# Altium PCB PCB.PcbDoc
Units mm, origin at the board's own origin, x right, y up, seen from the top; angles counter-clockwise.
Board outline 50 x 50 mm, 2 copper layers (Top Layer, Bottom Layer); 26 components, 12 nets, 63 pads, 12 vias.
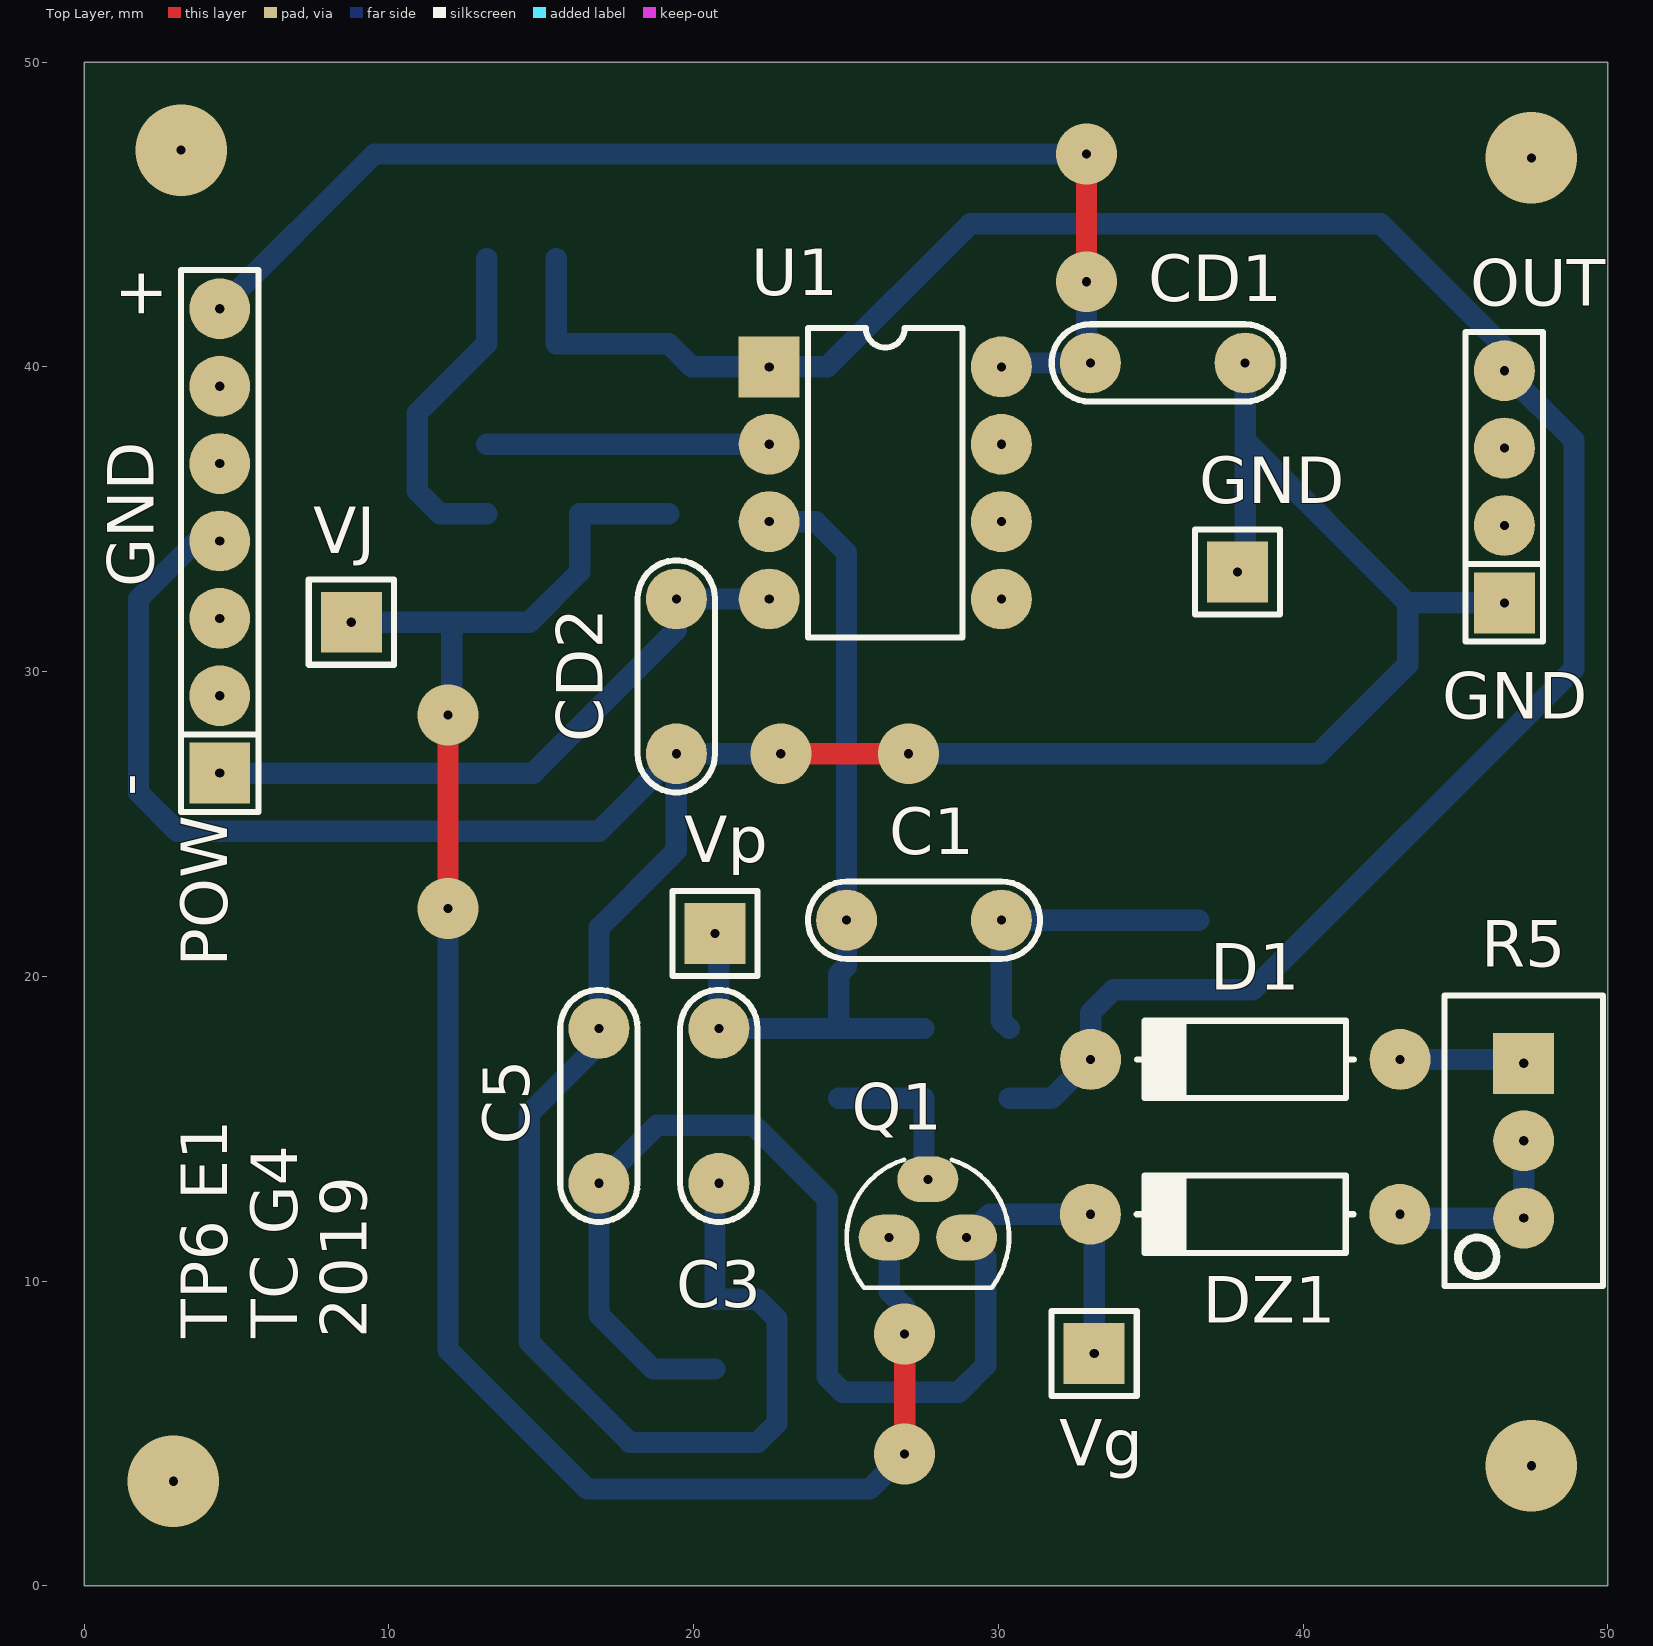
[diagram p0: Top Layer view]
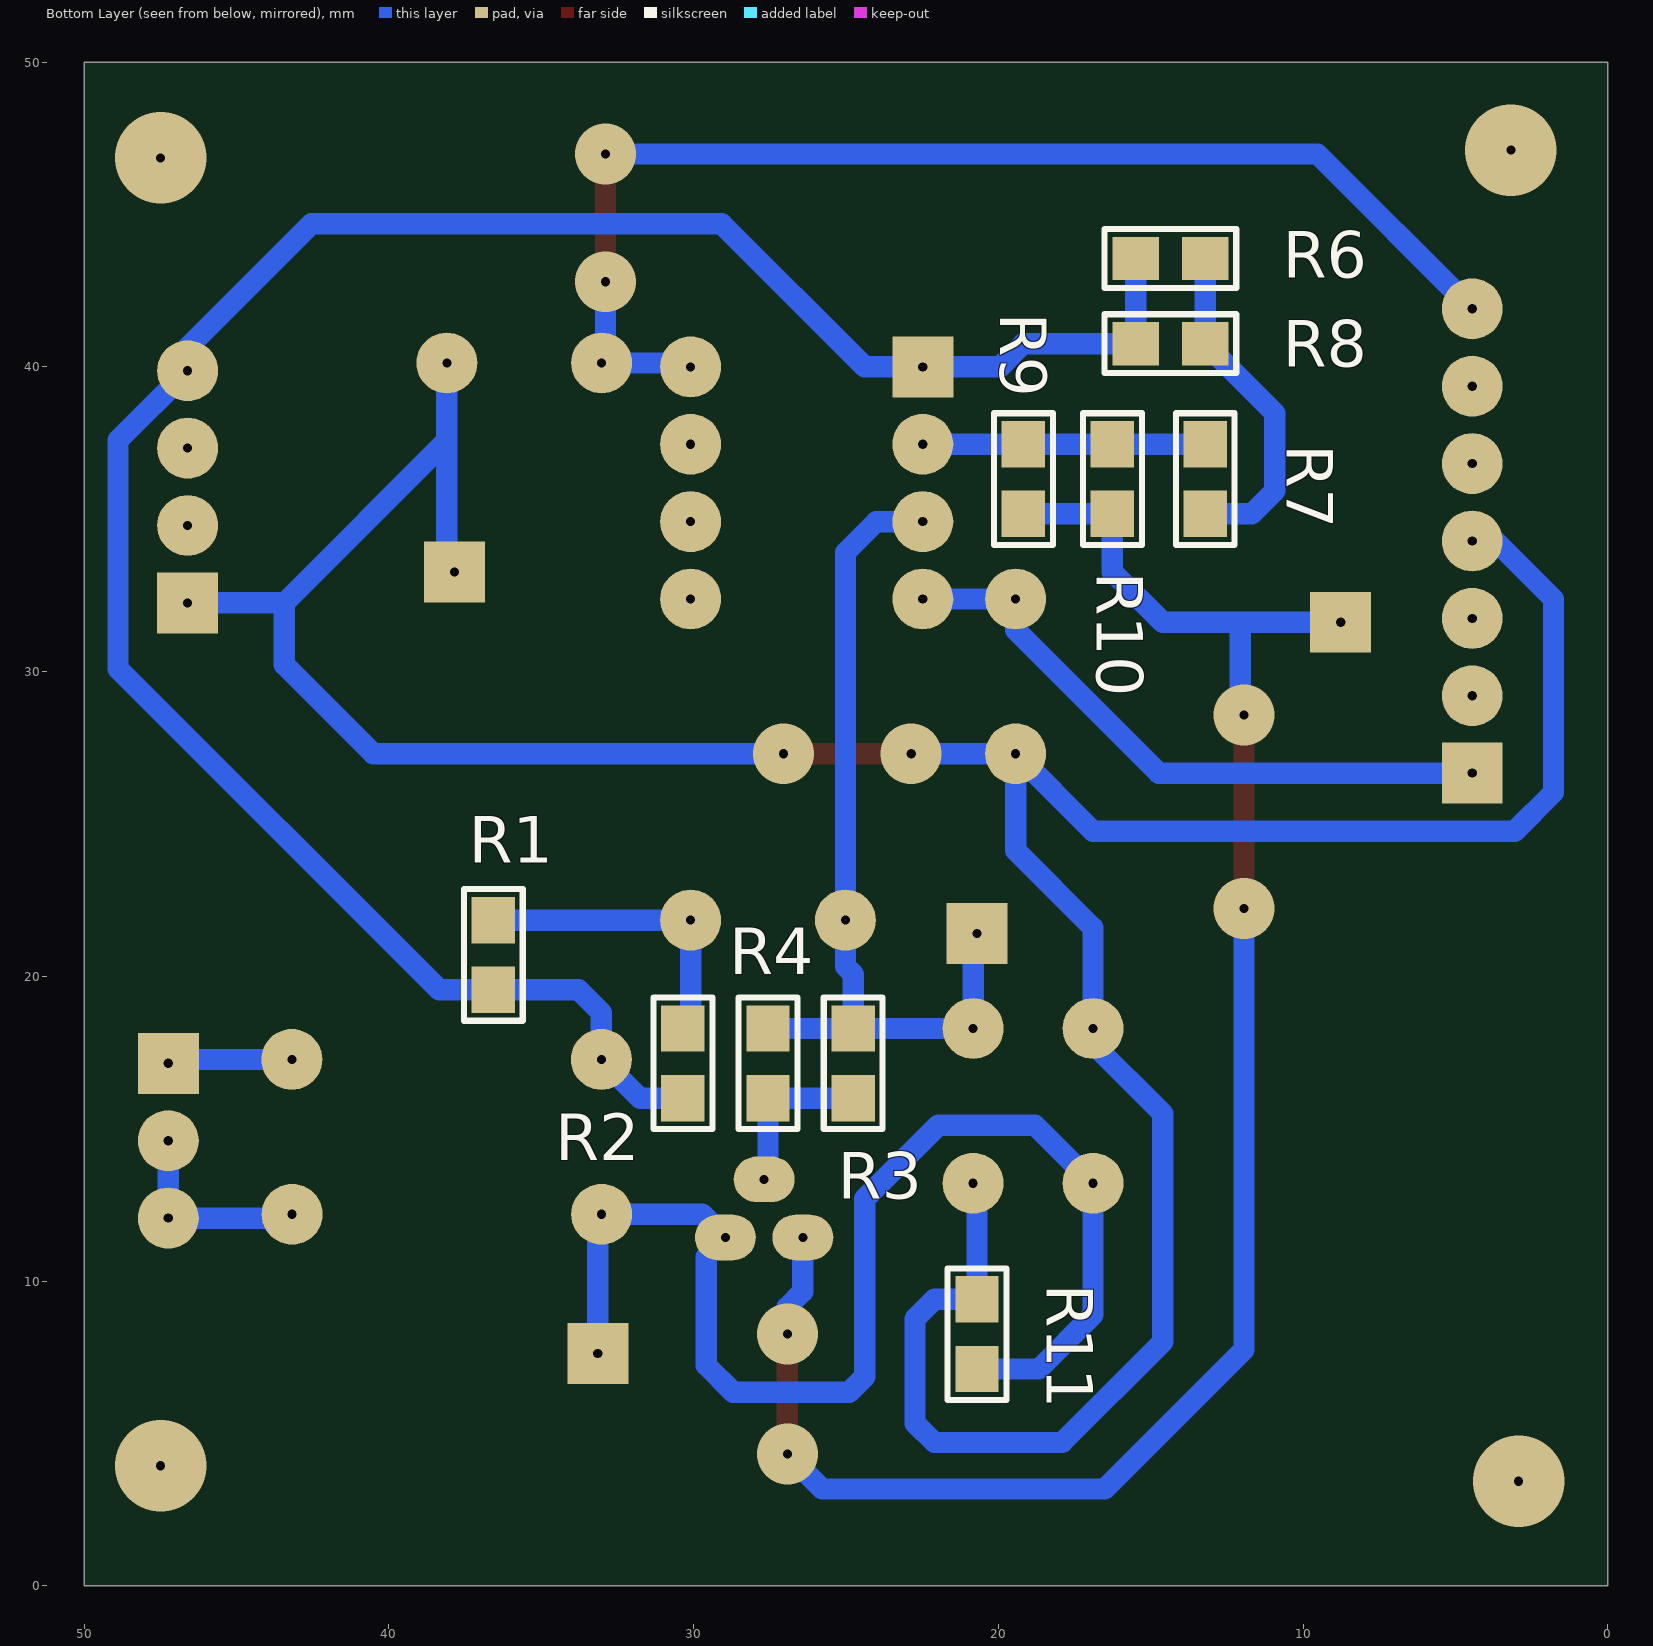
[diagram p1: Bottom Layer view, seen from below]
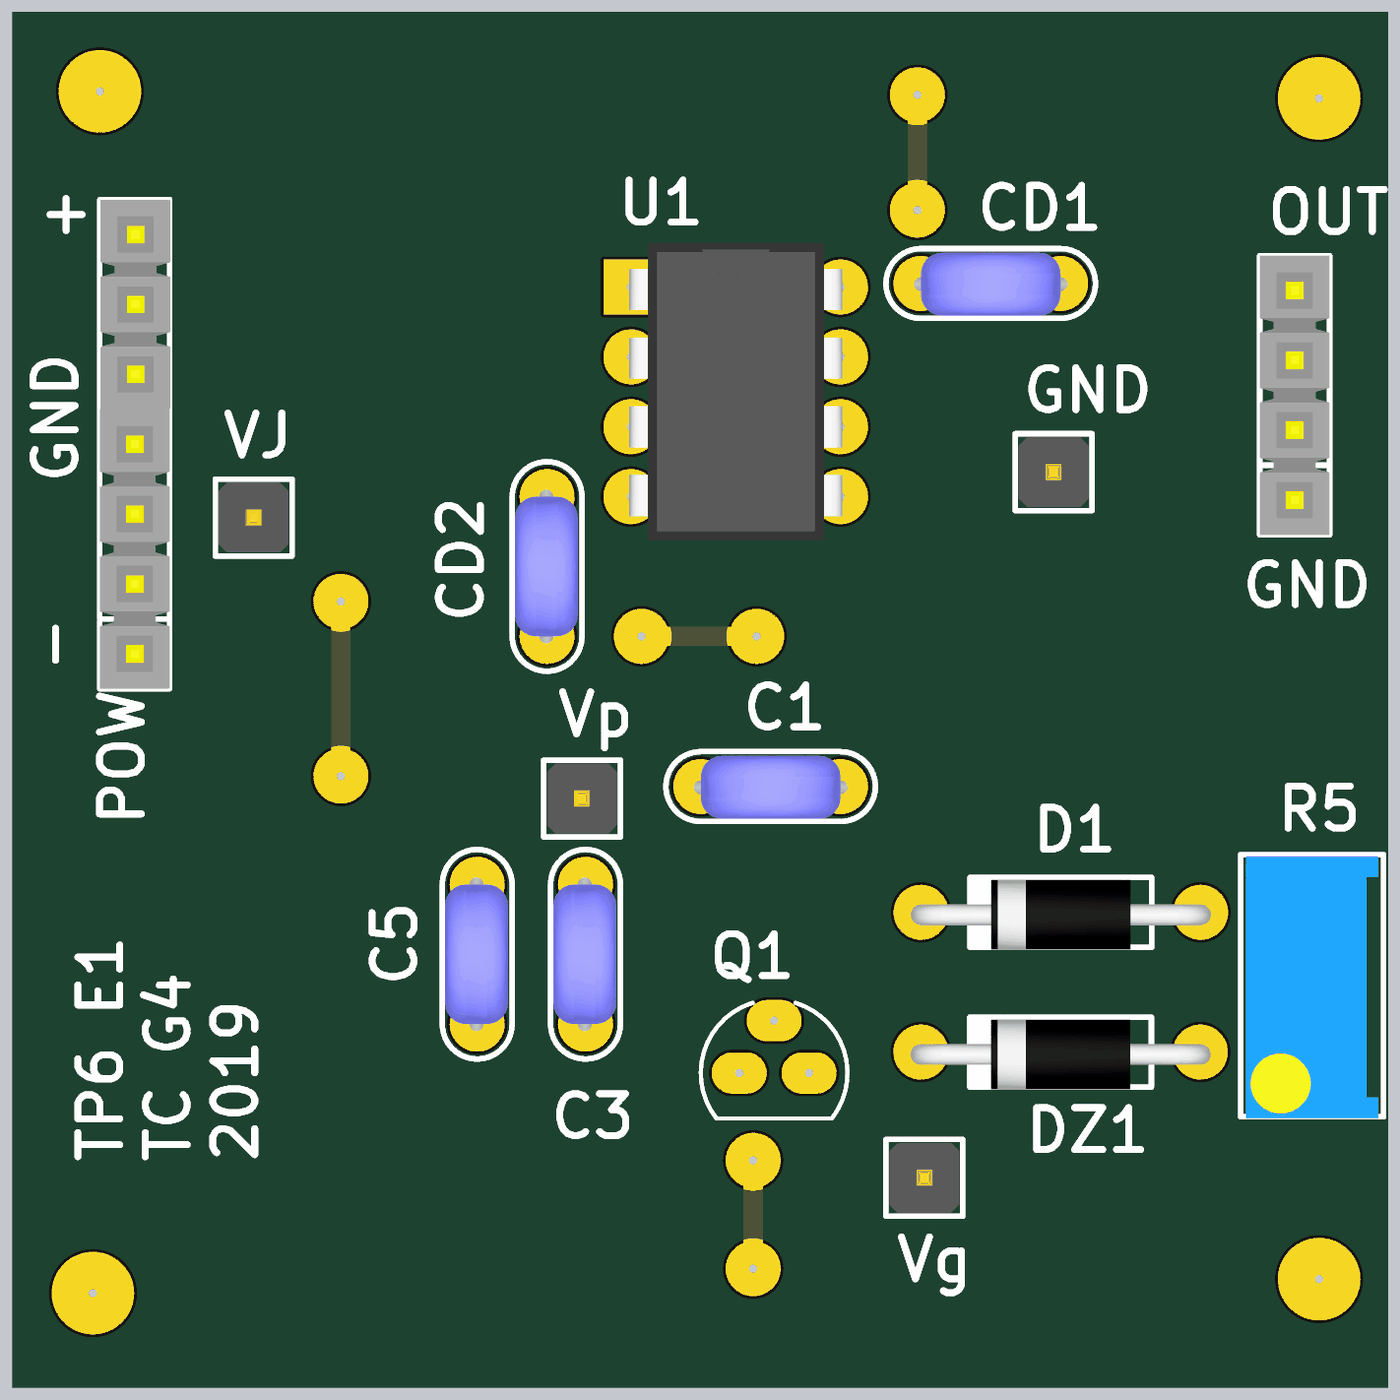
[diagram p2: 3D render of the assembled board from above, using the file's embedded part models]
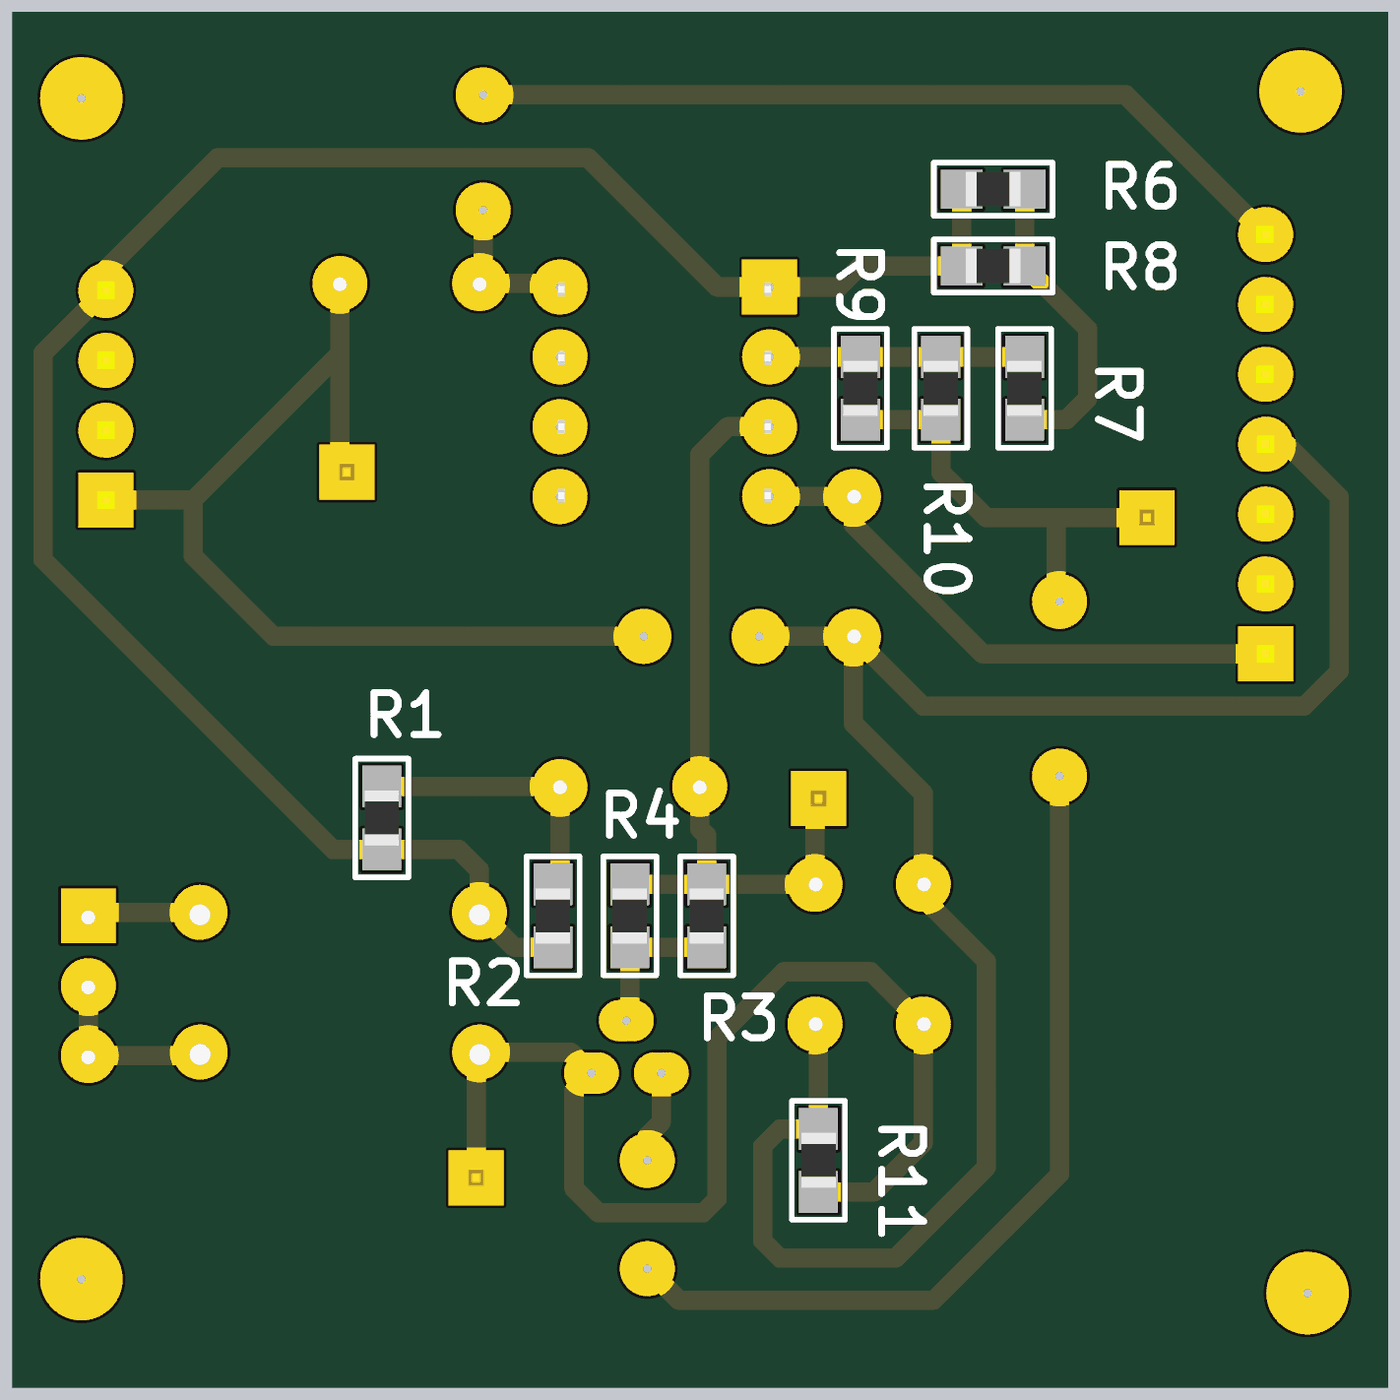
[diagram p3: 3D render of the assembled board from below, using the file's embedded part models]

## Layer stack, top to bottom
Top Solder: solder mask 0.0102, Solder Resist, Dk 3.5
Top Layer: signal copper 0.0356
Dielectric 1: dielectric 0.32, FR-4, Dk 4.8
Bottom Layer: signal copper 0.0356
Bottom Solder: solder mask 0.0102, Solder Resist, Dk 3.5

## Board outline
0,0 50,0 50,50 0,50

## Design rules (kind name [scope] priority, off if disabled: settings)
Clearance [All] p1: gap=0.254 ignorepadtopadclearanceinfootprint=FALSE except(0: Arc-Hole Track-Hole SMDPad-Hole THPad-Hole Via-Hole Fill-Hole Poly-Hole Region-Hole Text-Hole)
PolygonConnect [All] p1: connectstyle=Relief reliefconductorwidth=0.254 reliefentries=4 polygonreliefangle="90 Angle" airgapwidth=0.254
RoutingVias [All] p1: holewidth=0.711 width=1.27 viastyle="Through Hole" minholewidth=0.711 minwidth=1.27 maxholewidth=0.711 maxwidth=1.27
SolderMaskExpansion [All] p1: expansion=0.102
Width [All] p1: maxlimit=0.7 minlimit=0.7 preferedwidth=0.7 minimp=50.000000 maximp=50.000000 favimp=50.000000
30 further rules are at their usual default settings.

## Components (designator, comment, footprint, x,y, rotation, side; value= is the part's Value field where it differs from the comment)
C1 "10n" CAP200 27.559,21.844 r0 top
C3 "10n" CAP200 20.828,15.748 r270 top
C5 "10n" CAP200 16.891,15.748 r270 top
CD1 "10n" CAP200 35.56,40.132 r0 top
CD2 "10n" CAP200 19.431,29.845 r270 top
D1 "1N4148" DO41 38.108,17.272 r180 top
DZ1 "1N750" DO41 38.1,12.192 r180 top
GND "TP" TPTH 37.846,33.274 r0 top (schematic designator TP1)
OUT "CON4" SIP4 46.609,36.068 r90 top
POW "CON7" SIP7 4.445,26.67 r90 top
Q1 "MPF102" *TO92F 27.686,11.43 r0 top
R1 "390" 0805 36.576,20.701 r90 bottom
R2 "390" 0805 30.353,17.145 r90 bottom
R3 "390" 0805 24.765,17.145 r90 bottom
R4 "390" 0805 27.559,17.145 r90 bottom
R5 "1K" "PRESET V" 47.244,14.605 r270 top
R6 "10k" 0805 14.351,43.561 r180 bottom
R7 "470" 0805 13.208,36.322 r90 bottom
R8 "10k" 0805 14.351,40.767 r180 bottom
R9 "4.7k" 0805 19.177,36.322 r90 bottom
R10 "4.7k" 0805 16.256,36.322 r90 bottom
R11 "10k" 0805 20.701,8.255 r270 bottom
U1 "LM833" DIP8 22.479,40.005 r0 top
Vg "TP" TPTH 33.147,7.62 r0 top (schematic designator TP3)
VJ "TP" TPTH 8.763,31.623 r180 top (schematic designator TP4)
Vp "TP" TPTH 20.701,21.409 r0 top (schematic designator TP2)

## Footprints (in the part's own frame and the unit in brackets; to place one, negate y for a bottom-side part, rotate by r counter-clockwise, add the part's x,y. Pads: shape width x height; smd on the part's side, far side on the other; paste and mask are expansions set on the pad)
0805 [mil] "Pasivo 0805"
  rect 60x56 smd: 1(-45,0) 2(45,0)
  silkscreen extent -85,-38 85,38, body extent -39,-25 39,25, height 15
*TO92F [mm]
  oval 2x1.5 hole 0.3: 1(-1.27,0) 2(0,1.905) 3(1.27,0)
  Top Layer region: -0.649,0.226 -0.991,0.599 -1.496,0.621 -1.869,0.279 -1.891,-0.226 -1.549,-0.599 -1.044,-0.621 -0.671,-0.279
  Top Layer region: 0.621,2.131 0.279,2.504 -0.226,2.526 -0.599,2.184 -0.621,1.679 -0.279,1.306 0.226,1.284 0.599,1.626
  Top Layer region: 1.891,0.226 1.549,0.599 1.044,0.621 0.671,0.279 0.649,-0.226 0.991,-0.599 1.496,-0.621 1.869,-0.279
  Bottom Layer region: -0.649,0.226 -0.991,0.599 -1.496,0.621 -1.869,0.279 -1.891,-0.226 -1.549,-0.599 -1.044,-0.621 -0.671,-0.279
  Bottom Layer region: 0.621,2.131 0.279,2.504 -0.226,2.526 -0.599,2.184 -0.621,1.679 -0.279,1.306 0.226,1.284 0.599,1.626
  Bottom Layer region: 1.891,0.226 1.549,0.599 1.044,0.621 0.671,0.279 0.649,-0.226 0.991,-0.599 1.496,-0.621 1.869,-0.279
  Multi-Layer region: -0.649,0.226 -0.991,0.599 -1.496,0.621 -1.869,0.279 -1.891,-0.226 -1.549,-0.599 -1.044,-0.621 -0.671,-0.279
  Multi-Layer region: 0.621,2.131 0.279,2.504 -0.226,2.526 -0.599,2.184 -0.621,1.679 -0.279,1.306 0.226,1.284 0.599,1.626
  Multi-Layer region: 1.891,0.226 1.549,0.599 1.044,0.621 0.671,0.279 0.649,-0.226 0.991,-0.599 1.496,-0.621 1.869,-0.279
  silkscreen extent -2.66,-1.65 2.66,2.55
CAP200 [mm]
  round 2 hole 0.3: 1(-2.54,0) 2(2.54,0)
  silkscreen extent -3.81,-1.27 3.81,1.27, body extent -2.79,-1.17 2.79,1.12, height 6.24
DIP8 [mm]
  rect 2x2 hole 0.3: 1(0,0)
  round 2 hole 0.3: 2(0,-2.54) 3(0,-5.08) 4(0,-7.62) 5(7.62,-7.62) 6(7.62,-5.08) 7(7.62,-2.54) 8(7.62,0)
  silkscreen extent 1.27,-8.89 6.35,1.27, body extent -0.06,-9.21 7.7,1.59, height 4.5
DO41 [mm]
  round 2 hole 0.3: 1(-5.08,0) 2(5.08,0)
  silkscreen extent -3.56,-1.27 3.56,1.27, body extent -5.46,-1.19 5.46,1.37, height 2.03
"PRESET V" [mm]
  rect 2x2 hole 0.3: 1(-2.54,0)
  round 2 hole 0.3: 2(0,0) 3(2.54,0)
  silkscreen extent -4.76,-2.6 4.76,2.6, body extent -4.7,-2.42 4.83,2.42, height 11.55
SIP4 [mm]
  rect 2x2 hole 0.3: 1(-3.81,0)
  round 2 hole 0.3: 2(-1.27,0) 3(1.27,0) 4(3.81,0)
  silkscreen extent -5.08,-1.27 5.08,1.27, body extent -5.08,-1.27 5.08,1.27, height 8.38
SIP7 [mm]
  rect 2x2 hole 0.3: 1(0,0)
  round 2 hole 0.3: 2(2.54,0) 3(5.08,0) 4(7.62,0) 5(10.16,0) 6(12.7,0) 7(15.24,0)
  silkscreen extent -1.27,-1.27 16.51,1.27, body extent -1.27,-1.3 16.51,1.27, height 8.38
TPTH [mm]
  rect 2x2 hole 0.3: 1(0,0)
  silkscreen extent -1.4,-1.4 1.4,1.4, body extent -1.27,-1.27 1.27,1.27, height 6.04

## Part data
C1 C3 C5 CD1 CD2: library part CAP
D1: library part DIODO
DZ1: library part "DIODO ZENER"
Q1: "JFET 25V 10mA", Package="TO-226-3 ON Semiconductor", Availability=Unavailable, MF="ON Semiconductor", MP=MPF102, Price=None, SnapEDA_Link=https://www.snapeda.com/parts/MPF102/ON%20Semiconductor/view-part/?ref=snap
R1 R2 R3 R4 R6 R7 R8 R9 R10 R11: library part RES
R5: library part PRESET
U1: "Dual Audio Operational Amplifier"

## Via types
v1: diameter 2, hole 0.3, Top Layer to Bottom Layer, 8 vias
v2: diameter 3, hole 0.3, Top Layer to Bottom Layer, 4 vias

## Nets (pads, with @x,y where several pads share a name; then routed paths per layer and width w, separated by ;. In a path a pad name is that pad's centre, name@x,y a point inside that pad or via, vN(x,y) a via of type N, cw(c..) or ccw(c..) an arc to the next point about the centre after c; other vN are vias at no path point)
GND: C3.2 C5.1 CD1.2 CD2.2 GND.1 OUT.1 POW.4 Q1.2 R3.1 R4.1 R11.1 | length 118.9
  Top Layer w0.7: v1(22.86,27.305) v1@26.543,27.305
  Bottom Layer w0.7: POW.4 3.683,34.29 1.778,32.385 1.778,26.035 3.048,24.765 16.891,24.765 CD2.2 ; C3.2 20.701,13.081 R11.1 22.098,9.398 22.733,8.763 22.733,5.334 22.098,4.699 17.907,4.699 14.605,8.001 14.605,15.494 16.891,17.78 C5.1 16.891,21.59 19.431,24.13 CD2.2 ; v1@22.098,27.305 CD2.2 ; R3.1 R4.1 27.559,13.462 Q1.2 ; v1(27.051,27.305) 40.513,27.305 43.434,30.226 43.434,32.258 ; GND.1 38.1,33.528 38.1,37.592 ; CD1.2 38.1,37.592 ; OUT.1 43.434,32.258 ; 38.1,37.592 43.434,32.258
NetC1_2: C1.2 R1.2 R2.2 | length 10.1
  Bottom Layer w0.7: R2.2 30.099,18.542 C1.2 R1.2
NetD1_1: D1.1 R5.1 | length 4.1
  Bottom Layer w0.7: D1.1 47.117,17.272 R5.1
NetDZ1_1: DZ1.1 R5.2 R5.3 | length 6.7
  Bottom Layer w0.7: DZ1.1 43.307,12.065 R5.3 R5.2
NetR6_2: R6.2 R7.1 R8.2 | length 11.2
  Bottom Layer w0.7: R7.1 11.684,35.179 10.922,35.941 10.922,38.481 R8.2 R6.2
NetR7_2: R7.2 R9.2 R10.2 U1.2 | length 9.3
  Bottom Layer w0.7: R7.2 R10.2 R9.2 U1.2
OUT: D1.2 OUT.4 R1.1 R2.1 R6.1 R8.1 U1.1 | length 74.6
  Bottom Layer w0.7: R6.1 R8.1 19.177,40.767 19.939,40.005 U1.1 24.384,40.005 29.083,44.704 42.545,44.704 46.609,40.64 OUT.4 48.895,37.592 48.895,30.099 38.354,19.558 R1.1 33.782,19.558 33.028,18.804 D1.2 31.758,16.002 R2.1
VCC: CD1.1 POW.7 U1.8 | length 40.2
  Top Layer w0.7: v1@32.893,43.053 v1(32.893,46.99)
  Bottom Layer w0.7: POW.7 9.525,46.99 v1(32.893,46.99) ; U1.8 30.226,40.132 CD1.1 32.893,40.259 v1(32.893,42.799)
VEE: CD2.1 POW.1 U1.4 | length 21
  Bottom Layer w0.7: POW.1 14.732,26.67 19.431,31.369 CD2.1 U1.4
Vg: C5.2 DZ1.2 Q1.3 R11.2 Vg.1 | length 43.2
  Bottom Layer w0.7: R11.2 18.669,7.112 16.891,8.89 C5.2 18.796,15.113 21.971,15.113 24.384,12.7 24.384,6.858 24.892,6.35 28.702,6.35 29.591,7.239 29.591,10.795 Q1.3 29.718,12.192 DZ1.2 33.147,12.065 Vg.1
VJ: Q1.1 R9.1 R10.1 VJ.1 | length 59.6
  Top Layer w0.7: v1@11.938,22.86 v1(11.938,28.575) ; v1(26.924,4.318) v1@26.924,7.62
  Bottom Layer w0.7: VJ.1 12.065,31.623 ; v1(11.938,22.225) 11.938,7.747 16.51,3.175 25.781,3.175 v1(26.924,4.318) ; v1@12.065,29.21 12.065,31.623 ; R9.1 R10.1 16.256,33.274 14.605,31.623 12.065,31.623 ; Q1.1 26.416,9.652 26.924,9.144 v1(26.924,8.255)
Vp: C1.1 C3.1 R3.2 R4.2 U1.3 Vp.1 | length 28.6
  Bottom Layer w0.7: Vp.1 20.828,21.282 C3.1 R3.2 ; U1.3 24.003,34.925 25.019,33.909 C1.1 25.019,20.32 24.765,20.066 R3.2 ; R4.2 R3.2
pads on no net: OUT.2 OUT.3 POW.2 POW.3 POW.5 POW.6 U1.5 U1.6 U1.7
copper on no net:
  other v2: 2.921,3.429 47.498,3.937 47.498,46.863 3.175,47.117

## Silkscreen, mask and mechanical layers (free items; w line width, h text height)
Top Overlay:
  text "+" at 2.54,41.529 h1.52 r90
  text "GND" at 2.286,32.766 h1.52 r90
  text "GND" at 44.577,28.448 h1.52
  text "-" at 2.159,25.908 h1.52 r90
  text "TP6 E1 / TC G4 / 2019" at 9.271,8.128 h1.52 r90